# Altium PCB PCB1.PcbDoc
Units mm, origin at the board's own origin, x right, y up, seen from the top; angles counter-clockwise.
Board outline 67.25 x 100.25 mm, 2 copper layers (Top Layer, Bottom Layer); 33 components, 33 nets, 148 pads, 0 vias.
Unrouted connection lines stored in the file: 87.
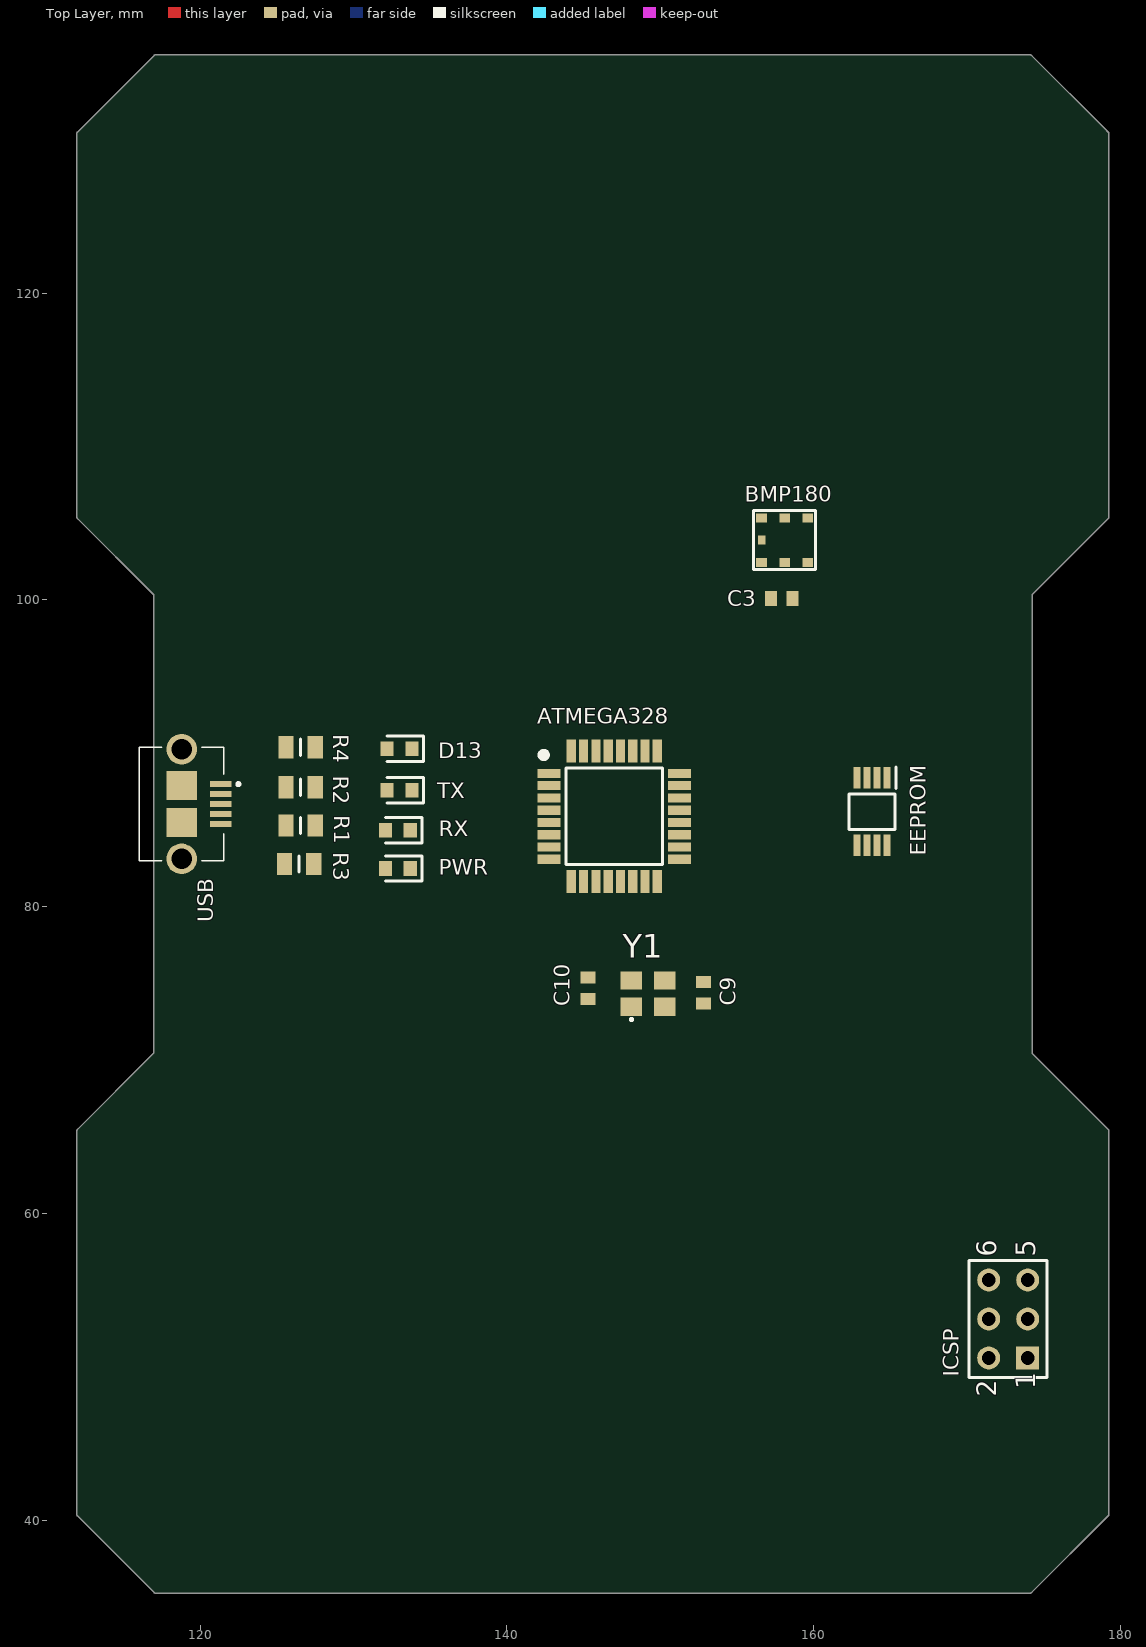
[diagram p0: Top Layer view]
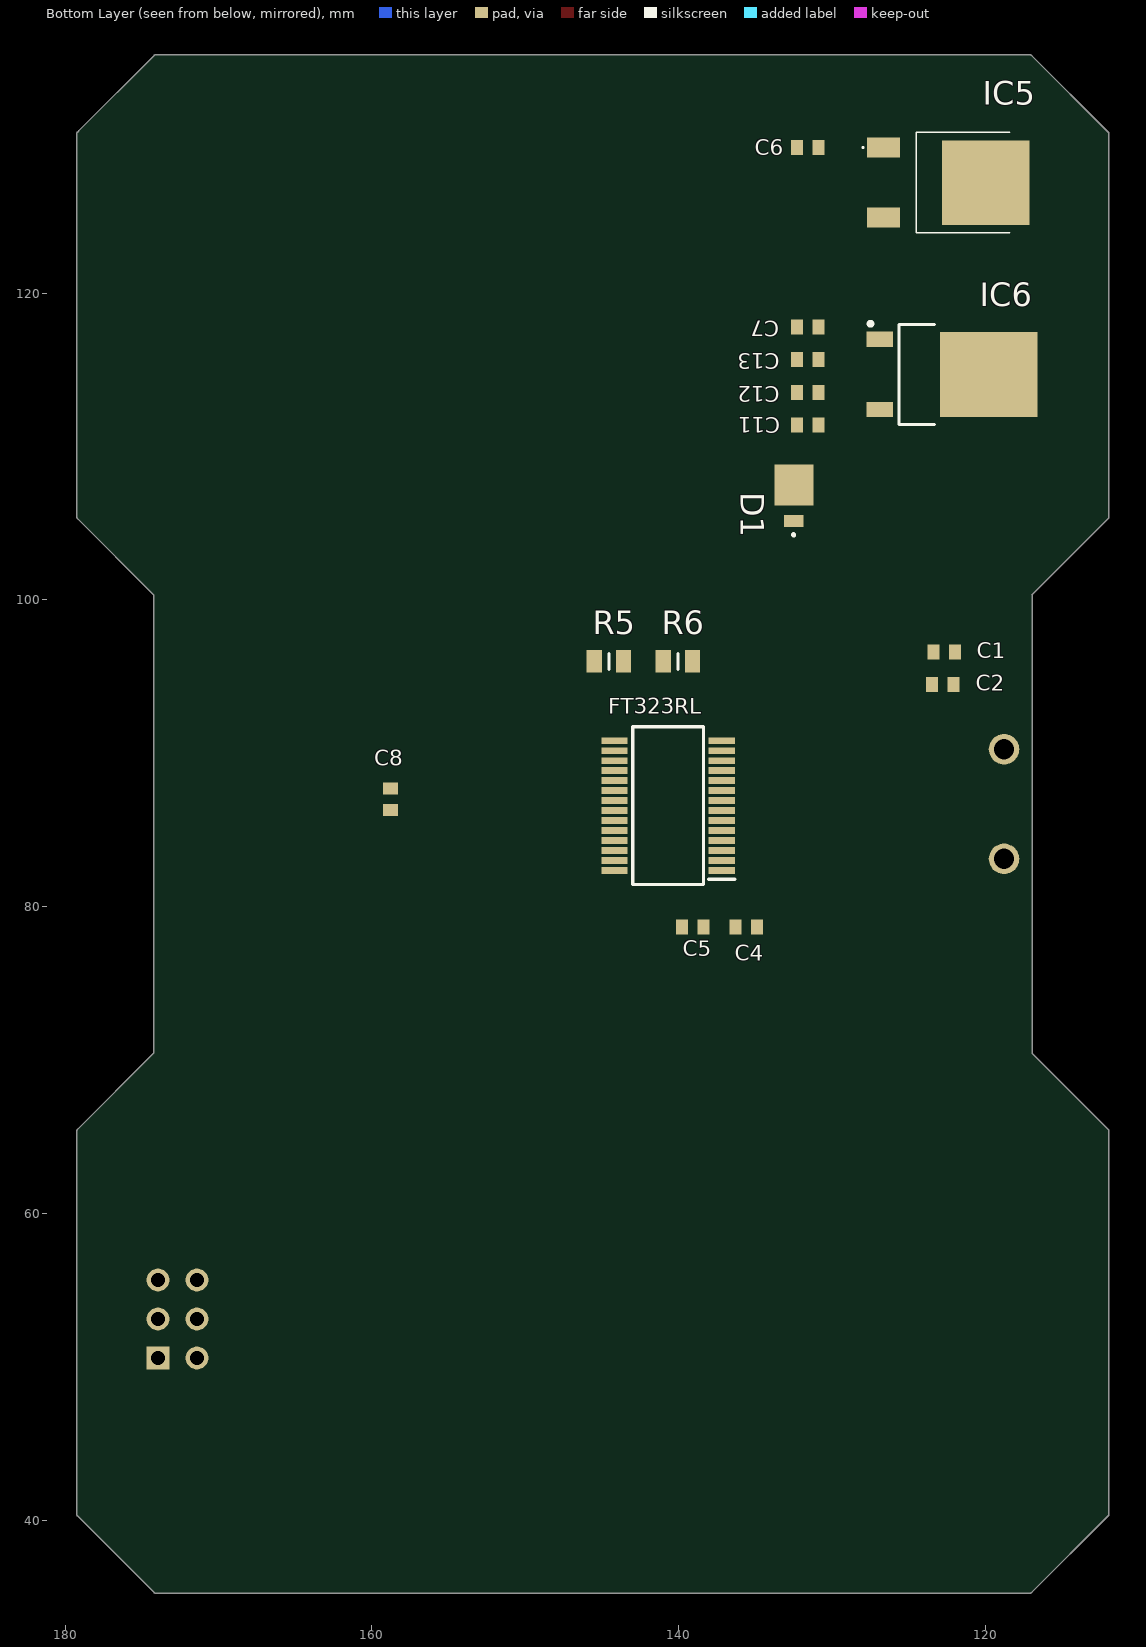
[diagram p1: Bottom Layer view, seen from below]

## Layer stack, top to bottom
Top Solder: solder mask 0.0102, Solder Resist, Dk 3.5
Top Layer: signal copper 0.0356
Dielectric 1: dielectric 0.32, FR-4, Dk 4.8
Bottom Layer: signal copper 0.0356
Bottom Solder: solder mask 0.0102, Solder Resist, Dk 3.5

## Board outline
111.994,40.329 ccw(c112.1,40.4) 112.01,40.309 ccw(c112.1,40.4) 112.011,40.309 112.01,40.309 117.009,35.31 ccw(c117.1,35.4) 117.1,35.273 174.1,35.273 ccw(c174.1,35.4) 174.19,35.31 179.19,40.31 179.19,40.309 ccw(c179.1,40.4) 179.227,40.4 179.227,65.4 ccw(c179.1,65.4) 179.19,65.49 174.227,70.453 174.227,100.347 179.19,105.31 179.19,105.309 ccw(c179.1,105.4) 179.227,105.4 179.227,130.4 ccw(c179.1,130.4) 179.125,130.525 ccw(c179,130.5) 179.09,130.59 174.19,135.49 ccw(c174.1,135.4) 174.1,135.527 117.1,135.527 ccw(c117.1,135.4) 117.009,135.49 ccw(c117.1,135.4) 117.009,135.489 117.01,135.49 112.01,130.49 cw(c112.1,130.4) 112.01,130.491 112.01,130.49 117.01,135.49 112.01,130.49 ccw(c112.1,130.4) 111.994,130.471 ccw(c112.1,130.4) 111.973,130.4 ccw(c112.1,130.4) 111.973,130.4 cw(c112.1,130.4) 111.973,130.4 cw(c112.1,130.4) 112.01,130.49 111.973,130.4 111.973,105.4 ccw(c112.1,105.4) 112.01,105.309 112.01,105.31 116.979,100.341 ccw(c117.1,100.3) 116.973,100.3 116.973,70.453 112.01,65.49 ccw(c112.1,65.4) 111.973,65.399 111.973,40.401 ccw(c112.1,40.4)

## Design rules (kind name [scope] priority, off if disabled: settings)
Clearance [All] p1: gap=0.254 ignorepadtopadclearanceinfootprint=FALSE except(0: Arc-Hole Track-Hole THPad-Hole Via-Hole Fill-Hole Poly-Hole Region-Hole Text-Hole; 0.178: SMDPad-SMDPad SMDPad-THPad SMDPad-Via SMDPad-Fill SMDPad-Poly SMDPad-Region SMDPad-Text SMDPad-Hole)
PolygonConnect [All] p1: connectstyle=Relief reliefconductorwidth=0.254 reliefentries=4 polygonreliefangle="90 Angle" airgapwidth=0.254
RoutingVias [All] p1: holewidth=0.711 width=1.27 viastyle="Through Hole" minholewidth=0.711 minwidth=1.27 maxholewidth=0.711 maxwidth=1.27
SilkToSolderMaskClearance [IsPad] p1: minsilkscreentomaskgap=0.127 clearancetoexposedcopper=TRUE
SolderMaskExpansion [All] p1: expansion=0.102 istentingtop=FALSE
Width [All] p1: maxlimit=0.254 minlimit=0.254 preferedwidth=0.254
29 further rules are at their usual default settings.

## Classes and differential pairs
component class Sheet2: ATMEGA328 C8 C9 C10 C11 C12 C13 R5 R6 Y1
component class Sheet1: BMP180 C1 C2 C3 C4 C5 C6 C7 D1 D13 EEPROM FT323RL IC5 IC6 ICSP PWR R1 R2 R3 R4 RX TX USB

## Components (designator, comment, footprint, x,y, rotation, side; value= is the part's Value field where it differs from the comment)
ATMEGA328 "ATMEGA328P-AU" QFP80P900X900X120-32N 147,85.9 r0 top
BMP180 "BMP180" BMP180 158.1,103.9 r90 top
C1 "100n" CAPC1608X87N 122.7,96.6 r0 bottom
C2 "4.7u  16v +" CAPC1608X87N 122.8,94.5 r0 bottom
C3 "0.1u" CAPC1608X87N 157.9,100.1 r0 top
C4 "100n" CAPC1608X87N 135.6,78.7 r180 bottom
C5 "100n" CAPC1608X87N 139.1,78.7 r0 bottom
C6 "1u" CAPC1608X87N 131.6,129.5 r0 bottom
C7 "1u" CAPC1608X87N 131.6,117.8 r0 bottom
C8 "100n" CAPC1608X87N 158.8,87 r270 bottom
C9 "22p" CAPC1608X87N 152.8,74.4 r90 top
C10 "22p" CAPC1608X87N 145.3,74.7 r270 top
C11 "1u" CAPC1608X87N 131.6,111.4 r0 bottom
C12 "4.7u 16v +" CAPC1608X87N 131.6,113.533 r0 bottom
C13 "1uf" CAPC1608X87N 131.6,115.667 r0 bottom
D1 "SS1P3L-M3_85A" SMP 132.5,105.179 r270 bottom
D13 "HSMR-C190" LEDC1608X80N 133,90.3 r180 top
EEPROM "EEPROM 24LC256" SOP65P490X110-8N 163.8,86.2 r270 top
FT323RL "FT232RL" SOP65P778X200-28N 140.7,86.6 r0 bottom
IC5 "LM1117DTX-3.3_NOPB" LM1117DTX33NOPB 122.543,127.2 r180 bottom
IC6 "LM1117DT-5.0_NOPB" TO228P991X238-3N 122.2,114.7 r180 bottom
ICSP "ICSP Header" HDR2X3 173.94,50.6 r90 top
PWR "HSMR-C190" LEDC1608X80N 132.9,82.5 r180 top
R1 "1k" RESC2012X65N 126.55,85.3 r0 top
R2 "1k" RESC2012X65N 126.55,87.8 r180 top
R3 "1k" RESC2012X65N 126.45,82.8 r0 top
R4 "1k" RESC2012X65N 126.55,90.4 r180 top
R5 "1k" RESC2012X65N 144.55,96 r180 bottom
R6 "1k" RESC2012X65N 140.05,96 r180 bottom
RX "HSMR-C190" LEDC1608X80N 132.9,85 r180 top
TX "HSMR-C190" LEDC1608X80N 133,87.6 r180 top
USB "USB3090-30-A" USB309030A 118.8,86.7 r270 top
Y1 "7M-16.000MEEQ-T" 7M 149.2,74.35 r0 top

## Footprints (in the part's own frame and the unit in brackets; to place one, negate y for a bottom-side part, rotate by r counter-clockwise, add the part's x,y. Pads: shape width x height; smd on the part's side, far side on the other; paste and mask are expansions set on the pad)
7M [mm]
  rect 1.4x1.2 smd: 1(-1.1,-0.85) 2(1.1,-0.85) 3(1.1,0.85) 4(-1.1,0.85)
  silkscreen extent -1.12,-1.73 -1.05,-1.66, body extent -1.91,-1.52 1.9,1.52, height 0.51
BMP180 [mm]
  rect 0.6x0.7 smd: 1(-1.45,1.5) 2(-1.45,0) 3(-1.45,-1.5) 4(1.45,-1.5) 5(1.45,0) 6(1.45,1.5)
  rect 0.6x0.5 smd: 7(0,1.5)
  silkscreen extent -1.92,-2.02 1.92,2.02, body extent -1.8,-1.9 1.8,1.9, height 0.94
CAPC1608X87N [mm]
  rect 0.78x0.98 smd: 1(-0.7,0) 2(0.7,0)
  body extent -0.8,-0.4 0.8,0.4, height 0.87
HDR2X3 [mm] "Connector; Header; 3x2 Position"
  rect 1.5x1.5 hole 0.9: 1(0,0)
  round 1.5 hole 0.9: 2(0,2.54) 3(2.54,0) 4(2.54,2.54) 5(5.08,0) 6(5.08,2.54)
  silkscreen extent -1.27,-1.27 6.35,3.81
LEDC1608X80N [mm]
  rect 0.85x0.95 smd: 1(-0.8,0) 2(0.8,0)
  silkscreen extent -1.58,-0.82 0.8,0.82, body extent -1.06,-0.46 1,0.45, height 0.85
LM1117DTX33NOPB [mm]
  rect 2.15x1.3 smd: 1(-4.122,2.285) 3(-4.122,-2.285)
  rect 5.7x5.5 smd: 4(2.543,0)
  silkscreen extent -5.5,-3.27 4.12,3.27, body extent -4.12,-3.25 2.88,3.25, height 1.61
QFP80P900X900X120-32N [mm]
  rect 1.5x0.6 smd: 1(-4.25,2.8) 2(-4.25,2) 3(-4.25,1.2) 4(-4.25,0.4) 5(-4.25,-0.4) 6(-4.25,-1.2) 7(-4.25,-2) 8(-4.25,-2.8) 17(4.25,-2.8) 18(4.25,-2) 19(4.25,-1.2) 20(4.25,-0.4) 21(4.25,0.4) 22(4.25,1.2) 23(4.25,2) 24(4.25,2.8)
  rect 0.6x1.5 smd: 9(-2.8,-4.25) 10(-2,-4.25) 11(-1.2,-4.25) 12(-0.4,-4.25) 13(0.4,-4.25) 14(1.2,-4.25) 15(2,-4.25) 16(2.8,-4.25) 25(2.8,4.25) 26(2,4.25) 27(1.2,4.25) 28(0.4,4.25) 29(-0.4,4.25) 30(-1.2,4.25) 31(-2,4.25) 32(-2.8,4.25)
  silkscreen extent -4.8,-3.15 3.15,4.2, body extent -4.5,-4.5 4.5,4.5, height 1.2
RESC2012X65N [mm]
  rect 1x1.45 smd: 1(-0.95,0) 2(0.95,0)
  silkscreen extent 0,-0.53 0,0.53, body extent -1,-0.62 1,0.63, height 0.65
SMP [mm]
  rect 0.762x1.27 smd: 1(0.03,0)
  rect 2.67x2.54 smd: 2(-2.321,0)
  silkscreen extent 0.89,-0.06 0.97,0.02, body extent -3.45,-1.01 0.4,1.02, height 1.01
SOP65P490X110-8N [mm]
  rect 1.4x0.45 smd: 1(-2.2,0.975) 2(-2.2,0.325) 3(-2.2,-0.325) 4(-2.2,-0.975) 5(2.2,-0.975) 6(2.2,-0.325) 7(2.2,0.325) 8(2.2,0.975)
  silkscreen extent -2.9,-1.5 1.15,1.55, body extent -2.45,-1.5 2.45,1.5, height 1.1
SOP65P778X200-28N [mm]
  rect 1.7x0.45 smd: 1(-3.5,4.225) 2(-3.5,3.575) 3(-3.5,2.925) 4(-3.5,2.275) 5(-3.5,1.625) 6(-3.5,0.975) 7(-3.5,0.325) 8(-3.5,-0.325) 9(-3.5,-0.975) 10(-3.5,-1.625) 11(-3.5,-2.275) 12(-3.5,-2.925) 13(-3.5,-3.575) 14(-3.5,-4.225) 15(3.5,-4.225) 16(3.5,-3.575) 17(3.5,-2.925) 18(3.5,-2.275) 19(3.5,-1.625) 20(3.5,-0.975) 21(3.5,-0.325) 22(3.5,0.325) 23(3.5,0.975) 24(3.5,1.625) 25(3.5,2.275) 26(3.5,2.925) 27(3.5,3.575) 28(3.5,4.225)
  silkscreen extent -4.35,-5.14 2.3,5.14, body extent -3.89,-5.14 3.89,5.14, height 2
TO228P991X238-3N [mm]
  rect 1.75x1 smd: 1(-4.7,2.285) 3(-4.7,-2.285)
  rect 6.35x5.55 smd: 4(2.4,0)
  silkscreen extent -5.43,-3.25 -1.15,3.42
USB309030A [mm]
  rect 0.4x1.4 smd: 1(-1.3,2.55) 2(-0.65,2.55) 3(0,2.55) 4(0.65,2.55) 5(1.3,2.55)
  rect 1.9x2 smd: 6(-1.2,0) 7(1.2,0)
  round 1.993 hole 1.328: 8(-3.575,0) 9(3.575,0)
  silkscreen extent -3.7,-2.75 3.7,3.8, body extent -4.1,-2.91 4.1,3.02, height 2.74

## Part data
ATMEGA328: "Integrated Circuit", Manufacturer_Name=Microchip, Mouser Part Number=556-ATMEGA328P-AU, Arrow Part Number=ATMEGA328P-AU, Arrow Price/Stock=https://www.arrow.com/en/products/atmega328p-au/microchip-technology, Datasheet Link=https://componentsearchengine.com/Datasheets/2/ATMEGA328P-AU.pdf, Height=1.2mm, Manufacturer_Part_Number=ATMEGA328P-AU, Mouser Price/Stock=https://www.mouser.co.uk/ProductDetail/Microchip-Technology-Atmel/ATMEGA328P-AU/?qs=K8BHR703ZXiCmmgp6%2FGNmQ%3D%3D
BMP180: "Integrated Circuit", Manufacturer_Name="Bosch Sensortec", Mouser Part Number=262-BMP180, Datasheet Link=http://ae-bst.resource.bosch.com/media/products/dokumente/bmp180/BST-BMP180-DS000-12~1.pdf, Manufacturer_Part_Number=BMP180, Mouser Price/Stock=https://www.mouser.co.uk/ProductDetail/Bosch-Sensortec/BMP180?qs=d72FGnIDsgTlLIC5YM2WKA%3D%3D
C1 C2 C3 C4 C5 C6 C7 C8 C9 C10 C11 C12 C13: library part C0603C569J5GACTU, "Capacitor", Manufacturer_Name=Kemet, Arrow Part Number=C0603C569J5GACTU, Arrow Price/Stock=https://www.arrow.com/en/products/c0603c569j5gactu/kemet-corporation, Datasheet Link=https://content.kemet.com/datasheets/KEM_C1003_C0G_SMD.pdf, Height=0.87mm, Manufacturer_Part_Number=C0603C569J5GACTU
D1: "Diode", Arrow Part Number=SS1P3L-M3/85A, Manufacturer_Name=Vishay, Mouser Part Number=625-SS1P3L-M3/85A, Arrow Price/Stock=https://www.arrow.com/en/products/ss1p3l-m385a/vishay, Datasheet Link=https://www.vishay.com/docs/88915/ss1p3l.pdf, Manufacturer_Part_Number=SS1P3L-M3/85A, Mouser Price/Stock=https://www.mouser.co.uk/ProductDetail/Vishay-General-Semiconductor/SS1P3L-M3-85A?qs=HSPD0Bff7iYLtqq1%2F0B2Eg%3D%3D
D13 PWR RX TX: "LED", Manufacturer_Name="Avago Technologies", Mouser Part Number=630-HSMR-C190, Datasheet Link=http://docs-emea.rs-online.com/webdocs/0db8/0900766b80db8877.pdf, Height=0.8mm, Manufacturer_Part_Number=HSMR-C190, Mouser Price/Stock=https://www.mouser.co.uk/ProductDetail/Broadcom-Avago/HSMR-C190?qs=YDL0qNrpDT6vgmbCvO9TGg%3D%3D
EEPROM: library part 24LC256-I_MS, "Integrated Circuit", Arrow Part Number=24LC256-I/MS, Manufacturer_Name=Microchip, Mouser Part Number=579-24LC256-I/MS, Arrow Price/Stock=https://www.arrow.com/en/products/24lc256-ims/microchip-technology, Datasheet Link=http://componentsearchengine.com/Datasheets/1/24LC256-I_MS.pdf, Height=1.1mm, Manufacturer_Part_Number=24LC256-I/MS, Mouser Price/Stock=https://www.mouser.co.uk/ProductDetail/Microchip-Technology/24LC256-I-MS?qs=XNV0BZVlaZHNGTPuq0J%2FVg%3D%3D
FT323RL: library part FT232RL-REEL, "Integrated Circuit", Manufacturer_Name="FTDI Chip", Mouser Part Number=895-FT232RL, Arrow Part Number=FT232RL-REEL, Arrow Price/Stock=https://www.arrow.com/en/products/ft232rl-reel/ftdi-chip, Datasheet Link=http://www.ftdichip.com/Support/Documents/DataSheets/ICs/DS_FT232R.pdf, Height=2mm, Manufacturer_Part_Number=FT232RL-REEL, Mouser Price/Stock=https://www.mouser.co.uk/ProductDetail/FTDI/FT232RL-REEL/?qs=D1%2FPMqvA103RC6OU6bKtoA%3D%3D
IC5: "Integrated Circuit", Arrow Part Number=LM1117DTX-3.3/NOPB, Manufacturer_Name="Texas Instruments", Mouser Part Number=926-LM1117DTX3.3NOPB, Arrow Price/Stock=https://www.arrow.com/en/products/lm1117dtx-3.3nopb/texas-instruments, Datasheet Link=http://www.ti.com/lit/gpn/lm1117, Manufacturer_Part_Number=LM1117DTX-3.3/NOPB, Mouser Price/Stock=https://www.mouser.co.uk/ProductDetail/Texas-Instruments/LM1117DTX-33-NOPB?qs=X1J7HmVL2ZFMDtR97FJi7A%3D%3D
IC6: "Integrated Circuit", Arrow Part Number=LM1117DT-5.0/NOPB, Manufacturer_Name="Texas Instruments", Mouser Part Number=926-LM1117DT50NOPB, Arrow Price/Stock=https://www.arrow.com/en/products/lm1117dt-5.0nopb/texas-instruments, Datasheet Link=http://docs-emea.rs-online.com/webdocs/0780/0900766b807800cc.pdf, Height=2.38mm, Manufacturer_Part_Number=LM1117DT-5.0/NOPB, Mouser Price/Stock=https://www.mouser.co.uk/ProductDetail/Texas-Instruments/LM1117DT-50-NOPB?qs=X1J7HmVL2ZGITaQRKQ6NVA%3D%3D
ICSP: library part "Header 3X2", "Header, 3-Pin, Dual row", LatestRevisionDate=17-Jul-2002, LatestRevisionNote="Re-released for DXP Platform.", Publisher="Altium Limited"
R1 R2 R3 R4 R5 R6: library part CPF0805B340RE1, "Resistor", Manufacturer_Name="TE Connectivity", Datasheet Link=http://docs-europe.electrocomponents.com/webdocs/13d1/0900766b813d116f.pdf, Height=0.65mm, Manufacturer_Part_Number=CPF0805B340RE1
USB: "Connector", Manufacturer_Name="GLOBAL CONNECTOR TECHNOLOGY", Datasheet Link=https://gct.co/files/drawings/usb3090.pdf, Height=2.7mm, Manufacturer_Part_Number=USB3090-30-A
Y1: "Crystal or Oscillator", Manufacturer_Name=TXC, Mouser Part Number=717-7M-16.000MEEQ-T, Arrow Part Number=7M-16.000MEEQ-T, Arrow Price/Stock=https://www.arrow.com/en/products/7m-16.000meeq-t/txc-corporation, Datasheet Link=http://www.mouser.com/ds/2/417/7m-11184.pdf, Manufacturer_Part_Number=7M-16.000MEEQ-T, Mouser Price/Stock=https://www.mouser.co.uk/ProductDetail/TXC-Corporation/7M-16000MEEQ-T?qs=65dIHZNch5syu%2FvH9aFnbA%3D%3D

## Nets (pads, with @x,y where several pads share a name; then routed paths per layer and width w, separated by ;. In a path a pad name is that pad's centre, name@x,y a point inside that pad or via, vN(x,y) a via of type N, cw(c..) or ccw(c..) an arc to the next point about the centre after c; other vN are vias at no path point)
+3V3: BMP180.2 BMP180.3 C3.2 C5.2 C6.2 FT323RL.17 IC5.4
+5V: ATMEGA328.4 ATMEGA328.6 ATMEGA328.18 C7.2 C11.2 C12.2 C13.2 D1.2 EEPROM.8 FT323RL.4 FT323RL.20 IC6.4 ICSP.2 R3.1 RX.2 TX.2
BLUE: 
D+: FT323RL.15 USB.3
D-: FT323RL.16 USB.2
GND: ATMEGA328.3 ATMEGA328.5 ATMEGA328.21 BMP180.7 C1.1 C2.1 C3.1 C5.1 C6.1 C7.1 C8.1 C9.1 C10.1 C11.1 C12.1 C13.1 D13.1 EEPROM.1 EEPROM.2 EEPROM.3 EEPROM.4 EEPROM.7 FT323RL.7 FT323RL.18 FT323RL.21 FT323RL.25 FT323RL.26 IC5.1 IC6.1 ICSP.6 PWR.1 USB.5 USB.6 USB.7 USB.8 USB.9 Y1.4
GREEN: 
MISO: ATMEGA328.16 ICSP.1
MOSI: ATMEGA328.15 ICSP.4
NetATMEGA328_7: ATMEGA328.7 C9.2 Y1.3
NetATMEGA328_8: ATMEGA328.8 C10.2 Y1.1
NetATMEGA328_20: ATMEGA328.20 C8.2
NetATMEGA328_30: ATMEGA328.30 R6.1
NetATMEGA328_31: ATMEGA328.31 R5.1
NetC4_2: C4.2 FT323RL.2
NetD13_2: D13.2 R4.1
NetFT323RL_22: FT323RL.22 R2.1
NetFT323RL_23: FT323RL.23 R1.1
NetLED?_1: 
NetLED?_2: 
NetLED?_3: 
NetPWR_2: PWR.2 R3.2
NetR1_2: R1.2 RX.1
NetR2_2: R2.2 TX.1
RED: 
RESET: ATMEGA328.29 C4.1 ICSP.5
RX: FT323RL.1 R6.2
SCK: ATMEGA328.17 ICSP.3 R4.2
SCL: BMP180.5 EEPROM.6
SDA: BMP180.6 EEPROM.5
TX: FT323RL.5 R5.2
VBUS: C1.2 C2.2 D1.1 USB.1
VIN: IC5.3 IC6.3
pads on no net: ATMEGA328.1 ATMEGA328.2 ATMEGA328.9 ATMEGA328.10 ATMEGA328.11 ATMEGA328.12 ATMEGA328.13 ATMEGA328.14 ATMEGA328.19 ATMEGA328.22 ATMEGA328.23 ATMEGA328.24 ATMEGA328.25 ATMEGA328.26 ATMEGA328.27 ATMEGA328.28 ATMEGA328.32 BMP180.1 BMP180.4 FT323RL.3 FT323RL.6 FT323RL.8 FT323RL.9 FT323RL.10 FT323RL.11 FT323RL.12 FT323RL.13 FT323RL.14 FT323RL.19 FT323RL.24 FT323RL.27 FT323RL.28 USB.4 Y1.2

## Silkscreen, mask and mechanical layers (free items; w line width, h text height)
Mechanical 15:
  lines w0.254: 117.1,100.3 117.1,70.4 112.1,65.4 112.1,40.4 ; 117.15,100.35 112.1,105.4 112.1,130.4 ; 179,130.5 174.1,135.4 117.1,135.4 ; 179.1,130.4 179.1,105.4 174.1,100.4 174.1,70.4 179.1,65.4 179.1,40.4 ; 112.1,40.4 117.1,35.4 ; 112.1,40.4 117.1,35.4 ; 112.1,130.4 112.1,130.4 ; 112.1,130.4 117.1,135.4 ; 112.1,130.4 117.1,135.4 ; 117.1,35.4 174.1,35.4 ; 174.1,35.4 179.1,40.4 ; 174.1,35.4 179.1,40.4

## Text inside footprints (layer, text, board x,y; h text height)
ICSP: Top Overlay "1" at 174.448,48.568 h1.27 r90; Top Overlay "2" at 171.908,48.06 h1.27 r90; Top Overlay "5" at 174.448,57.204 h1.27 r90; Top Overlay "6" at 171.908,57.204 h1.27 r90